# Altium PCB radxa_nx5_io_board_v1.4.PcbDoc (part 3 of 6)
Units mil, origin at the board's own origin, x right, y up, seen from the top; angles counter-clockwise.
Board outline 3937.73 x 3112.19 mil, 6 copper layers (Top, GND02, 内层3, Power4, 内层 5, Bottom), stack 58.1 mil thick; 363 components, 344 nets, 1618 pads, 1594 vias.
Unrouted connection lines stored in the file: 899.
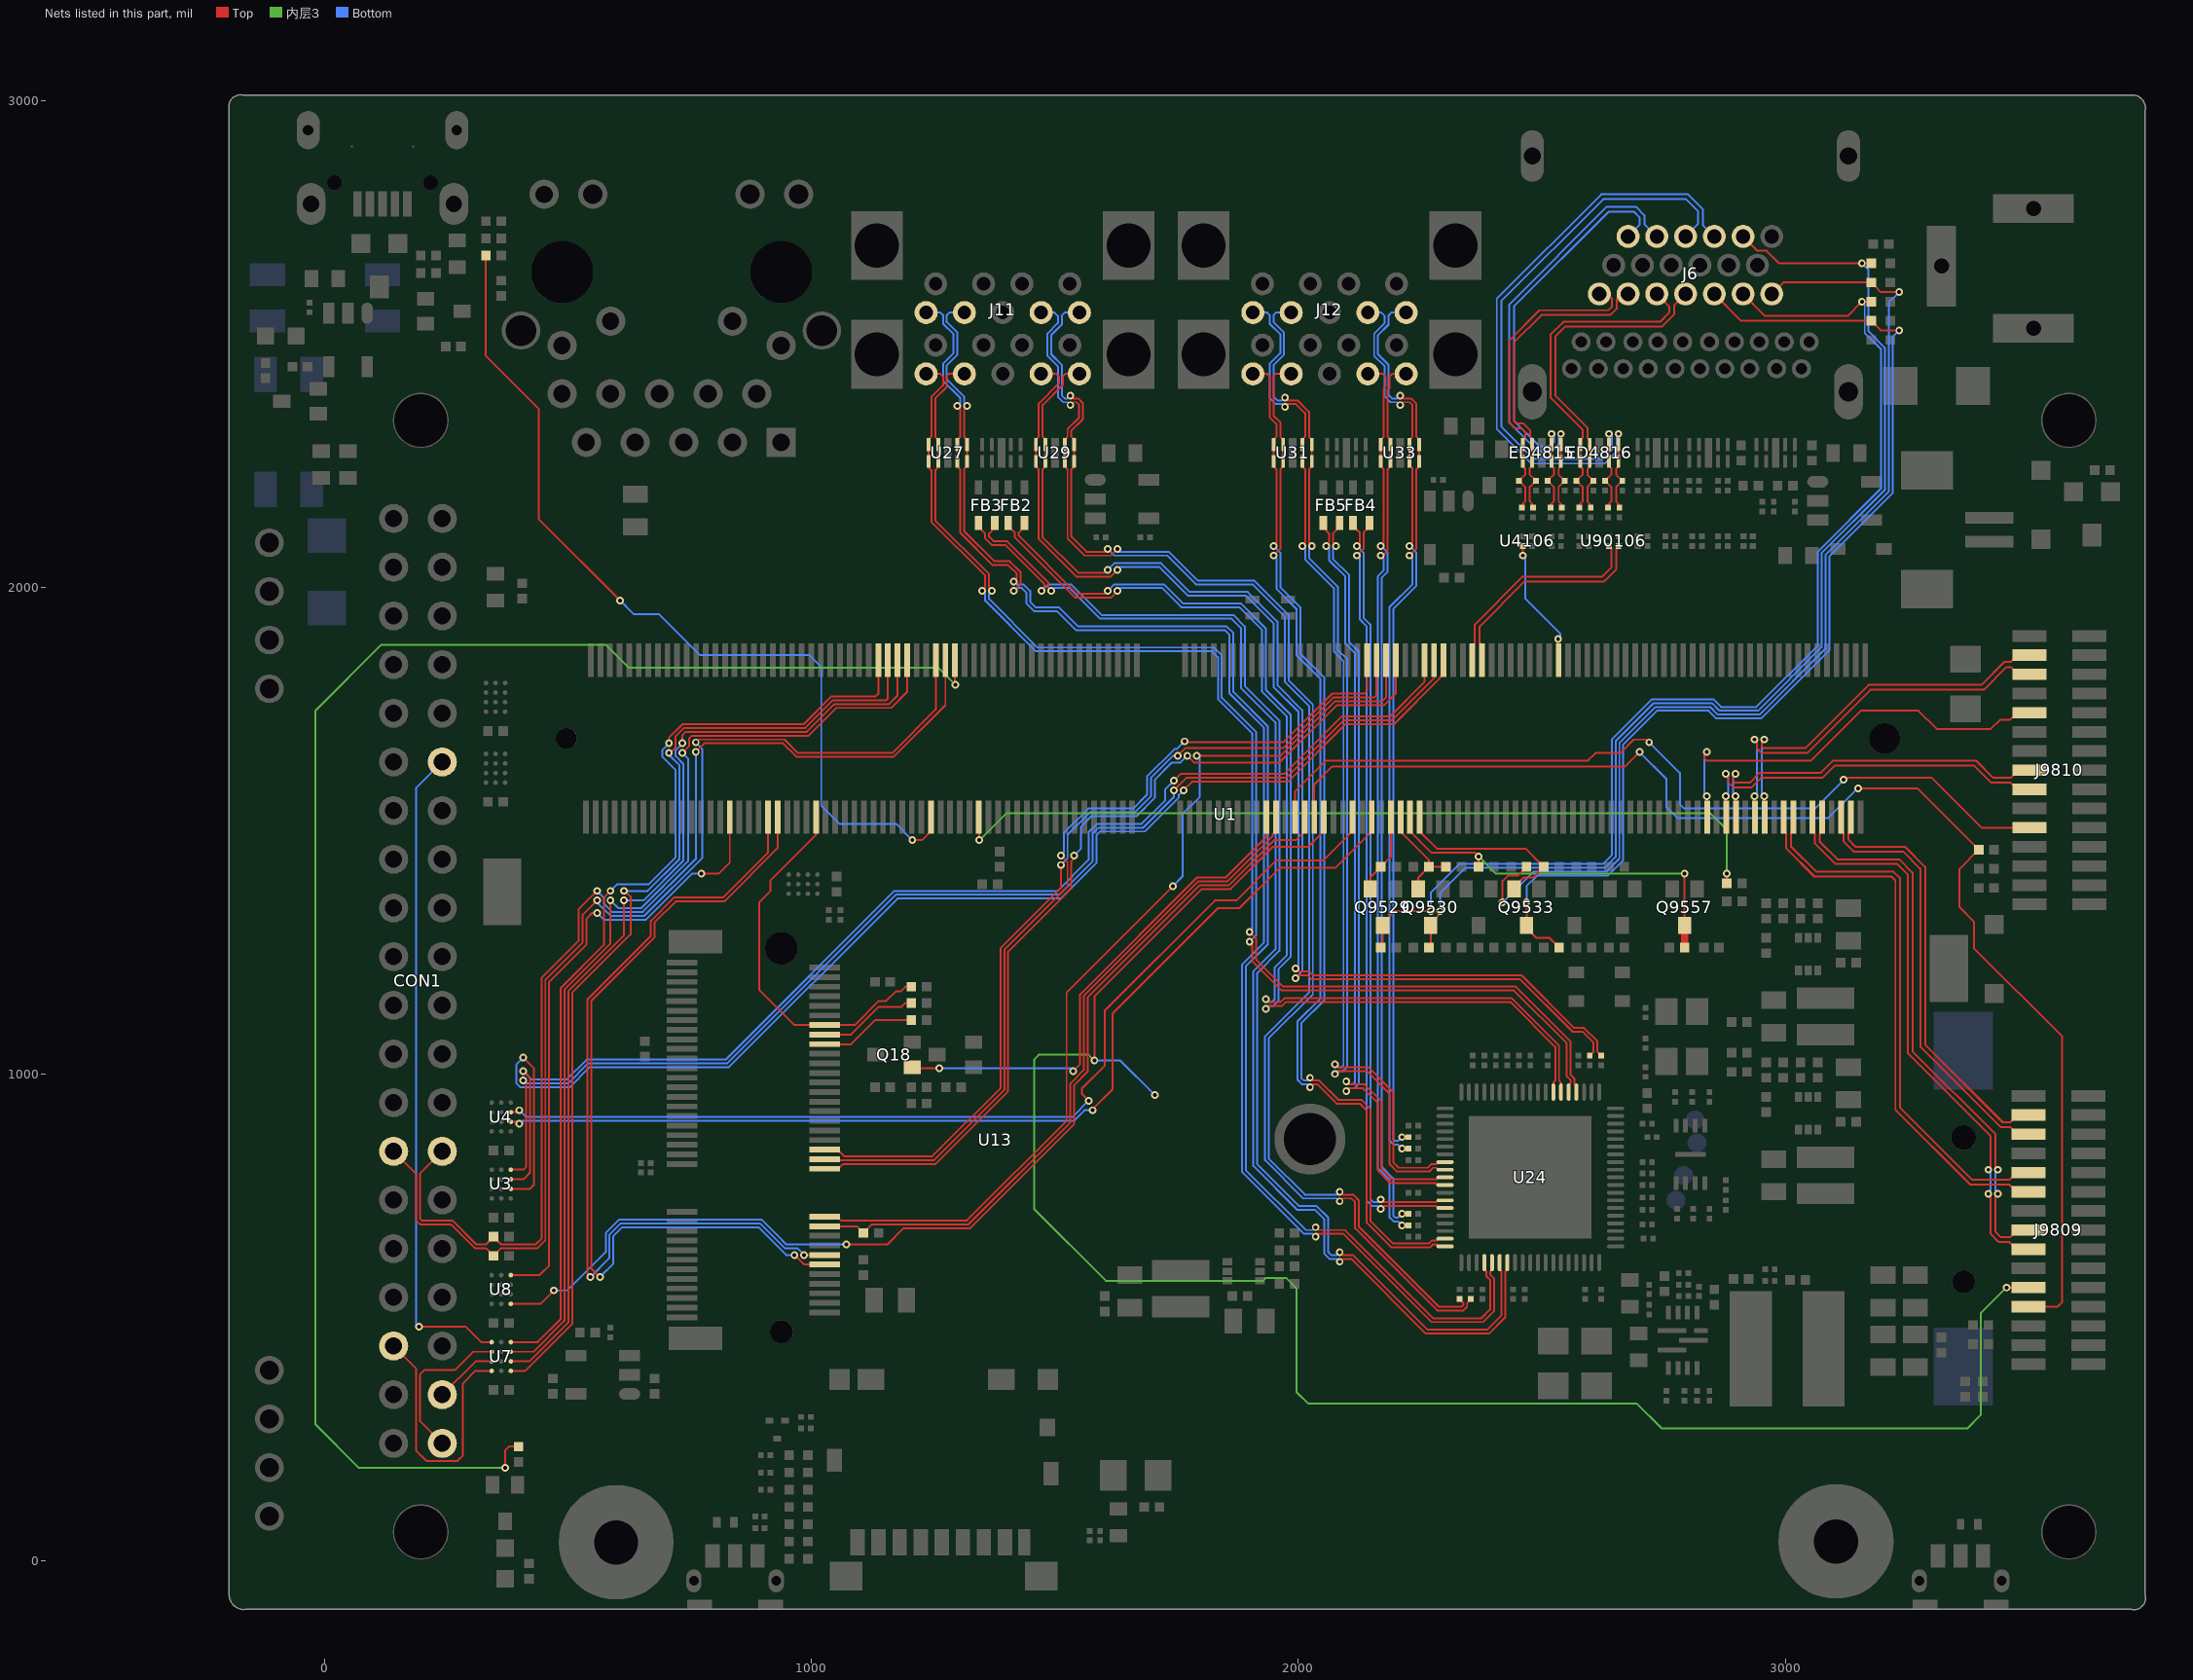
[diagram p6: the nets of this part, all layers, seen from the top]

## Via types
v1: diameter 15.75, hole 7.87, Top to Bottom, 1425 vias
v2: diameter 19.68, hole 11.81, Top to Bottom, 169 vias

## Nets (pads, with @x,y where several pads share a name; then routed paths per layer and width w, separated by ;. In a path a pad name is that pad's centre, name@x,y a point inside that pad or via, vN(x,y) a via of type N, cw(c..) or ccw(c..) an arc to the next point about the centre after c; other vN are vias at no path point) (continued)
HDMI0_TX2P: R95209.2 U1.65 U4106.1 | length 269.5
  Top w3.94: v1(2460.63,2064.96) U4106.1@2460.63,2084.65 ; v1(2533.46,1893.7) 2533.46,1850.39 U1.65@2534.45,1850.39
  Bottom w3.94: v1(2460.63,2064.96) 2460.63,2063.98 2465.55,2059.06 2465.55,1977.22 2538.39,1904.39 2538.39,1898.62 v1(2533.46,1893.7)
HDMI0_TX3N: R95216.2 U1.81 U90106.2 | length 451.1
  Top w3.94: U1.81@2376.97,1850.39 2376.97,1880.91 2372.05,1885.83 2372.05,1919.29 2464.57,2011.81 2628.09,2011.81 2652.56,2036.28 2652.56,2079.72 R95216.2@2657.48,2084.65 U90106.2@2656.69,2084.65
HDMI0_TX3P: R95215.2 U1.83 U90106.1 | length 450.3
  Top w3.94: U1.83@2357.28,1850.39 2357.28,1880.91 2362.2,1885.83 2362.2,1923.37 2460.49,2021.65 2624.02,2021.65 2642.72,2040.35 2642.72,2079.72 U90106.1@2637.8,2084.65
HDMI0_TX_ON_H: U1.118 U8.D3 | length 2263.8
  Top w3.94: U8.D3@381.89,527.56 442.91,527.56 v1(470.47,555.12) ; v1(1070.87,649.61) 1155.51,649.61 1188.98,683.07 1325.42,683.07 1539.37,897.02 1539.37,977.05 1566.93,1004.61 1566.93,1156.8 1797.92,1387.8 1857.53,1387.8 1950.05,1480.32 1994.57,1480.32 2005.5,1491.24 2005.5,1491.72 2012.8,1499.02 U1.118@2012.8,1527.56
  Bottom w3.94: v1(470.47,555.12) 498.03,555.12 576.77,633.86 576.77,673.23 604.33,700.79 896.9,700.79 928.98,669.29 928.98,668.71 948.09,649.61 v1(1070.87,649.61)
HDMI1_TX0N_PORT: C90466.2 ED4816.2 ED4816.9 J6.H9 R95103.1 | length 711.5
  Top w3.94: C90466.2@2600.39,2163.39 2600.39,2169.29 2593.5,2176.18 2593.5,2184.06 2593.5,2206.19 2605.82,2218.5 R95103.1@2606.3,2218.5 2593.5,2231.3 2593.5,2242.13 2598.43,2247.05 ED4816.2@2598.43,2258.37 ED4816.9@2598.43,2292.82 2598.43,2302.17 2593.5,2307.09 2593.5,2327.76 2527.56,2393.7 2527.56,2514.76 2548.23,2535.43 2747.05,2535.43 2771.65,2560.04 2771.65,2578.74 J6.H9@2795.28,2602.36
HDMI1_TX0P_PORT: C90465.2 ED4816.1 ED4816.10 J6.H7 R95104.1 | length 712.3
  Top w3.94: C90465.2@2576.77,2163.39 2576.77,2169.29 2583.66,2176.18 2583.66,2206.19 2571.34,2218.5 R95104.1@2570.87,2218.5 2583.66,2231.3 2583.66,2243.11 2578.74,2248.03 ED4816.1@2578.74,2258.37 ED4816.10@2578.74,2292.82 2578.74,2302.17 2583.66,2307.09 2583.66,2323.68 2517.72,2389.62 2517.72,2403.54 2517.72,2518.84 2544.15,2545.28 2742.97,2545.28 2761.81,2564.12 2761.81,2576.77 J6.H7@2736.22,2602.36
HDMI1_TX1N_PORT: C90464.2 ED4815.5 ED4815.6 J6.H6 R95101.1 | length 987.1
  Top w3.94: v1(2539.37,2314.96) ED4815.6@2539.37,2292.82 ED4815.5@2539.37,2258.37 2539.37,2248.03 2534.45,2243.11 2534.45,2231.3 R95101.1@2547.24,2218.5 2547.01,2218.74 2534.45,2206.19 2534.45,2184.06 2534.45,2176.18 2541.34,2169.29 C90464.2@2541.34,2163.39
  Bottom w3.94: v1(2539.37,2314.96) 2534.45,2310.04 2534.45,2294.01 2519.97,2279.53 2491.14,2279.53 2433.07,2337.6 2433.07,2580.71 2633.86,2781.5 2693.05,2781.5 2710.63,2763.92 2710.63,2746.06 J6.H6@2736.22,2720.47
HDMI1_TX1P_PORT: C90463.2 ED4815.4 ED4815.7 J6.H4 R95102.1 | length 920.9
  Top w3.94: C90463.2@2517.72,2163.39 2517.72,2169.29 2524.61,2176.18 2524.61,2206.19 2512.29,2218.5 R95102.1@2511.81,2218.5 2524.61,2231.3 2524.61,2245.08 2519.69,2250 ED4815.4@2519.69,2258.37 ED4815.7@2519.69,2292.82 v1(2519.69,2314.96)
  Bottom w3.94: v1(2519.69,2314.96) 2524.61,2310.04 2524.61,2298.08 2515.89,2289.37 2495.22,2289.37 2442.91,2341.68 2442.91,2576.63 2637.94,2771.65 2688.98,2771.65 2700.79,2759.84 2700.79,2744.09 J6.H4@2677.17,2720.47
HDMI1_TX2N_PORT: C90462.2 ED4815.2 ED4815.9 J6.H3 R95108.1 | length 665.6
  Top w3.94: C90462.2@2482.28,2163.39 2480.32,2165.35 2480.32,2171.26 2475.39,2176.18 2475.39,2206.19 2487.95,2218.74 R95108.1@2488.19,2218.5 2475.39,2231.3 2475.39,2244.09 2480.32,2249.02 ED4815.2@2480.32,2258.37 ED4815.9@2480.32,2292.82 2480.32,2302.17 2476.38,2306.1 2476.38,2321.99 2461.75,2336.61 2448.96,2336.61 2442.91,2342.66 2442.91,2502.95 2499.02,2559.06 2640.89,2559.06 2653.54,2571.71 2653.54,2591.54 2664.37,2602.36 J6.H3@2677.17,2602.36
HDMI1_TX2P_PORT: C90461.2 ED4815.1 ED4815.10 J6.H1 R95109.1 | length 668.5
  Top w3.94: C90461.2@2458.66,2163.39 2460.63,2165.35 2460.63,2171.26 2465.55,2176.18 2465.55,2206.19 2453.23,2218.5 R95109.1@2452.76,2218.5 2465.55,2231.3 2465.55,2243.11 2460.63,2248.03 ED4815.1@2460.63,2258.37 ED4815.10@2460.63,2292.82 2460.63,2303.15 2465.55,2308.07 2465.55,2318.9 2457.68,2326.77 2444.88,2326.77 2433.07,2338.58 2433.07,2507.03 2494.94,2568.9 2636.81,2568.9 2643.7,2575.79 2643.7,2593.5 2634.84,2602.36 J6.H1@2618.11,2602.36
HDMI1_TX3N_PORT: C90468.2 ED4816.5 ED4816.6 J6.H12 R95106.1 | length 1349.7
  Top w3.94: v1(2657.48,2314.96) ED4816.6@2657.48,2292.82 ED4816.5@2657.48,2258.37 2657.48,2248.03 2652.56,2243.11 2652.56,2231.3 R95106.1@2665.35,2218.5 2665.12,2218.74 2652.56,2206.19 2652.56,2184.06 2652.56,2176.18 2659.45,2169.29 C90468.2@2659.45,2163.39
  Bottom w3.94: v1(2657.48,2314.96) 2653.54,2311.02 2653.54,2278.4 2629.08,2253.94 2478.35,2253.94 2407.48,2324.8 2407.48,2592.52 2622.05,2807.09 2800.34,2807.09 2830.71,2776.71 2830.71,2744.09 J6.H12@2854.33,2720.47
HDMI1_TX3P_PORT: C90467.2 ED4816.4 ED4816.7 J6.H10 R95107.1 | length 1285.9
  Top w3.94: C90467.2@2635.83,2163.39 2635.83,2169.29 2642.72,2176.18 2642.72,2206.19 2630.4,2218.5 R95107.1@2629.92,2218.5 2642.72,2231.3 2642.72,2244.09 2637.8,2249.02 ED4816.4@2637.8,2258.37 ED4816.7@2637.8,2292.82 v1(2637.8,2314.96)
  Bottom w3.94: v1(2637.8,2314.96) 2643.7,2309.06 2643.7,2282.48 2625,2263.78 2482.42,2263.78 2417.32,2328.88 2417.32,2588.44 2626.12,2797.24 2796.26,2797.24 2820.87,2772.64 2820.87,2746.06 J6.H10@2795.28,2720.47
HDMI1_TX_CEC_PORT: ED4820.1 J6.H13 Q9533.3 R95112.2 | length 2273.2
  Top w3.94: v1(2468.5,1352.36) Q9533.3@2468.5,1305.12 2468.5,1299.21 2488.19,1279.53 2515.75,1279.53 R95112.2@2535.43,1259.84 ; J6.H13@2854.33,2602.36 2909.45,2547.24 ED4820.1@3177.21,2547.24 3185.09,2539.37 3185.09,2538.68 3196.2,2527.56 v1(3234.25,2527.56)
  Bottom w3.94: v1(2468.5,1352.36) 2468.5,1385.83 2490.16,1407.48 2635.83,1407.48 2659.45,1431.1 2659.45,1431.36 2667.32,1439.23 2667.32,1676.94 2736.44,1746.06 2842.66,1746.06 2858.41,1730.32 2950.65,1730.32 3090.55,1870.22 3090.55,2062.99 3220.47,2192.91 3220.47,2513.78 v1(3234.25,2527.56)
HDMI1_TX_SBDN: ED4817.1 J6.H19 R95105.2 | length 2212.3
  Top w3.94: v1(2419.29,1352.36) 2419.29,1396.15 2430.62,1407.48 2450.79,1407.48 R95105.2@2468.5,1425.2 ; J6.H19@2972.44,2602.36 2996.06,2625.98 ED4817.1@3177.21,2625.98 3185.09,2618.11 3185.09,2617.42 3196.2,2606.3 v1(3234.25,2606.3)
  Bottom w3.94: v1(2419.29,1352.36) 2482.28,1415.35 2632.31,1415.35 2659.45,1442.49 2659.45,1680.21 2733.18,1753.94 2845.92,1753.94 2861.67,1738.19 2947.39,1738.19 3082.68,1873.48 3082.68,2066.25 3212.6,2196.17 3212.6,2584.65 v1(3234.25,2606.3)
HDMI1_TX_SCL_PORT: ED4819.1 J6.H15 Q9529.3 R95095.2 | length 2426.8
  Top w3.94: R95095.2@2169.29,1259.84 2173.23,1263.78 Q9529.3@2173.23,1305.12 2173.23,1309.06 2198.82,1334.65 v1(2271.65,1334.65) ; J6.H15@2913.39,2602.36 2958.66,2557.09 3127.95,2557.09 v1(3157.48,2586.61) ED4819.1@3177.21,2586.61
  Bottom w3.94: v1(2271.65,1334.65) 2271.65,1372.05 2330.71,1431.1 2625.79,1431.1 2643.7,1449.02 2643.7,1686.73 2726.66,1769.69 2852.44,1769.69 2868.19,1753.94 2940.86,1753.94 3066.93,1880 3066.93,2072.78 3196.85,2202.7 3196.85,2488.86 3163.39,2522.33 3163.39,2580.71 v1(3157.48,2586.61)
HDMI1_TX_SDA_PORT: ED4818.1 J6.H16 Q9530.3 R95098.2 | length 2416
  Top w3.94: R95098.2@2267.72,1259.84 2271.65,1263.78 Q9530.3@2271.65,1305.12 2271.65,1306.69 2293.31,1332.68 v1(2291.34,1334.65) ; J6.H16@2913.39,2720.47 2942.91,2690.94 2961.61,2690.94 2987.2,2665.35 v1(3157.48,2665.35) ED4818.1@3177.21,2665.35
  Bottom w3.94: v1(2291.34,1334.65) 2291.34,1372.05 2342.52,1423.23 2629.05,1423.23 2651.57,1445.76 2651.57,1683.47 2729.92,1761.81 2849.18,1761.81 2864.93,1746.06 2944.12,1746.06 3074.8,1876.74 3074.8,2069.52 3204.72,2199.44 3204.72,2492.13 3171.26,2525.59 3171.26,2651.57 v1(3157.48,2665.35)
HDMI-SCL: Q9529.2 R95094.2 U1.100 | length 165.2
  Top w3.94: Q9529.2@2147.64,1379.92 2147.64,1403.54 R95094.2@2169.29,1425.2 2189.96,1445.87 U1.100@2189.96,1527.56
HDMI-SDA: C90472.2 Q9530.2 R95096.2 U1.98 | length 216.1
  Top w3.94: U1.98@2209.65,1527.56 2209.65,1498.03 2267.72,1439.96 R95096.2@2267.72,1425.2 ; Q9530.2@2246.06,1379.92 2246.06,1403.54 R95096.2@2267.72,1425.2 ; C90472.2@2303.15,1425.2 R95096.2@2267.72,1425.2
HDMI_TX0_CEC_M0: Q9533.2 R95111.2 U1.94 | length 396.7
  Top w3.94: U1.94@2249.02,1527.56 2249.02,1498.03 2284.45,1462.6 2466.54,1462.6 R95111.2@2503.94,1425.2 2482.28,1403.54 2462.6,1403.54 2442.91,1383.86 Q9533.2@2442.91,1379.92
HDMI_TX0_HPD_M0: Q9557.3 R95114.1 R95205.1 U1.96 | length 802.6
  Top w3.94: U1.96@2229.33,1527.56 2229.33,1498.03 2272.64,1454.72 2362.2,1454.72 v1(2370.08,1446.85) R95114.1@2370.08,1425.2 ; Q9557.3@2793.31,1305.12 v1(2793.31,1411.42)
  Top w15.75: R95205.1@2793.31,1259.84 Q9557.3@2793.31,1305.12
  内层3 w3.94: v1(2370.08,1446.85) 2405.51,1411.42 v1(2793.31,1411.42)
HP_DET_L: U1.230 U8.A3 | length 1278.2
  Top w3.94: U8.A3@381.89,586.61 440.94,586.61 460.63,606.3 460.63,1188.98 537.4,1265.75 537.4,1318.9 549.21,1330.71 v1(559.06,1330.71) ; v1(773.62,1411.42) 809.06,1411.42 831.69,1434.06 U1.230@831.69,1527.56
  Bottom w3.94: v1(559.06,1330.71) 572.83,1316.93 659.45,1316.93 753.94,1411.42 v1(773.62,1411.42)
HUB1_DM: FB2.2 U24.64 | length 2196.5
  Top w3.94: FB2.2@1437.01,2131.89 1437.01,2124.02 1425.2,2112.2 1425.2,2105.62 1544.6,1986.22 1602.36,1986.22 v1(1608.27,1992.13) ; v1(1933.07,1133.86) 1938.98,1139.76 1966.54,1139.76 1974.41,1147.64 2435.04,1147.64 2527.56,1055.12 2527.56,986.22 2523.62,982.28 U24.64@2523.62,962.6
  Bottom w3.94: v1(1608.27,1992.13) 1622.05,2005.91 1723.43,2005.91 1762.8,1966.54 1881.89,1966.54 1933.07,1915.35 1933.07,1788.69 1984.25,1737.51 1984.25,1240.83 1958.66,1215.24 1958.66,1149.61 1948.82,1139.76 1938.98,1139.76 v1(1933.07,1133.86)
HUB1_DP: FB2.4 U24.63 | length 2197.3
  Top w3.94: FB2.4@1403.54,2131.89 1403.54,2125.98 1417.32,2112.2 1417.32,2102.36 1541.34,1978.35 1614.17,1978.35 v1(1627.95,1992.13) ; v1(1933.07,1153.54) 1938.98,1147.64 1963.27,1147.64 1971.15,1155.51 2438.3,1155.51 2535.43,1058.38 2535.43,986.22 2539.37,982.28 U24.63@2539.37,962.6
  Bottom w3.94: v1(1627.95,1992.13) 1633.86,1998.03 1720.16,1998.03 1759.53,1958.66 1878.63,1958.66 1925.2,1912.09 1925.2,1785.43 1976.38,1734.25 1976.38,1244.09 1950.79,1218.5 1950.79,1152.87 1945.56,1147.64 1938.98,1147.64 v1(1933.07,1153.54)
HUB1_SSRX_N: J11.5 U24.61 U27.5 U27.6 | length 2572.4
  Top w3.94: J11.5@1235.04,2438.19 1264.57,2438.19 1269.69,2433.07 1269.69,2414.68 1246.06,2391.06 1246.06,2309.06 1240.16,2303.15 U27.5@1240.16,2292.82 U27.6@1240.16,2258.37 1240.16,2246.06 1246.06,2240.16 1246.06,2133.86 1356.3,2023.62 1356.3,1998.03 v1(1350.39,1992.13) ; v1(1899.61,1291.34) 1913.39,1277.56 1913.39,1234.25 1968.5,1179.13 2446.17,1179.13 2559.06,1066.25 2559.06,998.03 2566.93,990.16 2566.93,980.32 2570.87,976.38 U24.61@2570.87,962.6
  Bottom w3.94: v1(1350.39,1992.13) 1356.3,1986.22 1356.3,1972.44 1460.63,1868.11 1822.83,1868.11 1834.65,1856.3 1834.65,1769.69 1905.51,1698.82 1905.51,1297.24 v1(1899.61,1291.34)
HUB1_SSRX_P: J11.6 U24.62 U27.4 U27.7 | length 2574.7
  Top w3.94: J11.6@1313.78,2438.19 1281.5,2438.19 1277.56,2434.25 1277.56,2411.42 1253.94,2387.8 1253.94,2309.06 1259.84,2303.15 U27.4@1259.84,2292.82 U27.7@1259.84,2258.37 1259.84,2246.06 1253.94,2240.16 1253.94,2137.12 1364.17,2026.88 1364.17,1998.03 v1(1370.08,1992.13) ; v1(1899.61,1271.65) 1905.51,1265.75 1905.51,1230.99 1965.24,1171.26 2442.91,1171.26 2551.18,1062.99 2551.18,994.77 2559.06,986.9 2559.06,980.32 2555.12,976.38 U24.62@2555.12,962.6
  Bottom w3.94: v1(1370.08,1992.13) 1364.17,1986.22 1364.17,1975.7 1463.89,1875.98 1826.1,1875.98 1842.52,1859.56 1842.52,1772.95 1913.39,1702.08 1913.39,1285.43 v1(1899.61,1271.65)
HUB1_SSTX_N: C73.2 J11.8 U29.1 U29.10 | length 2412.9
  Top w3.94: J11.8@1471.26,2438.19 1502.76,2438.19 1507.87,2433.07 1507.87,2418.62 1466.54,2377.28 1466.54,2309.06 1460.63,2303.15 U29.10@1460.63,2292.82 U29.1@1460.63,2258.37 1460.63,2248.03 1466.54,2242.13 1466.54,2099.1 1543.98,2021.65 1614.17,2021.65 v1(1627.95,2035.43) ; v1(1994.09,1216.54) 2000,1210.63 2021.65,1210.63 2029.53,1202.76 2457.99,1202.76 2566.25,1094.49 2586.61,1094.49 2614.17,1066.93 2614.17,1045.28 C73.2@2622.05,1037.4
  Bottom w3.94: v1(1627.95,2035.43) 1633.86,2041.34 1714.57,2041.34 1773.62,1982.28 1892.41,1982.28 1948.82,1925.87 1948.82,1795.28 2000,1744.09 2000,1222.44 v1(1994.09,1216.54)
HUB1_SSTX_P: C72.2 J11.9 U29.2 U29.9 | length 2420.4
  Top w3.94: J11.9@1550,2438.19 1520.87,2438.19 1515.75,2433.07 1515.75,2415.35 1474.41,2374.02 1474.41,2309.06 1480.32,2303.15 U29.9@1480.32,2292.82 U29.2@1480.32,2258.37 1480.32,2248.03 1474.41,2242.13 1474.41,2102.36 1547.24,2029.53 1602.36,2029.53 v1(1608.27,2035.43) ; v1(1994.09,1196.85) 2000,1202.76 2018.39,1202.76 2026.27,1194.88 2454.72,1194.88 2562.99,1086.61 2583.35,1086.61 2606.3,1063.67 2606.3,1045.28 C72.2@2598.43,1037.4
  Bottom w3.94: v1(1608.27,2035.43) 1622.05,2049.21 1717.83,2049.21 1776.88,1990.16 1895.67,1990.16 1956.69,1929.13 1956.69,1798.54 2007.87,1747.36 2007.87,1210.63 v1(1994.09,1196.85)
HUB2_DM: FB3.2 U24.26 | length 2627.2
  Top w3.94: FB3.2@1375.98,2131.89 1375.98,2122.05 1364.17,2110.24 1364.17,2103.66 1373.34,2094.49 1400.9,2094.49 1486.22,2009.17 1486.22,1998.03 v1(1492.13,1992.13) ; v1(2084.65,614.17) 2090.55,620.08 2108.27,620.08 2261.81,466.54 2391.06,466.54 2425.2,500.68 2425.2,594.49 2429.13,598.43 U24.26@2429.13,612.2
  Bottom w3.94: v1(1492.13,1992.13) 1498.03,1998.03 1529.53,1998.03 1592.52,1935.04 1862.88,1935.04 1881.89,1916.03 1881.89,1793.31 1952.76,1722.44 1952.76,1255.91 1907.48,1210.63 1907.48,811.02 1998.03,720.47 2034.14,720.47 2053.15,701.46 2053.15,630.6 2063.67,620.08 2078.74,620.08 v1(2084.65,614.17)
HUB2_DP: FB3.4 U24.25 | length 2637.9
  Top w3.94: FB3.4@1342.52,2131.89 1342.52,2124.02 1356.3,2110.24 1356.3,2100.39 1370.08,2086.61 1397.64,2086.61 1478.35,2005.91 1478.35,1998.03 v1(1472.44,1992.13) ; v1(2084.65,633.86) 2090.55,627.95 2111.53,627.95 2265.07,474.41 2387.8,474.41 2417.32,503.94 2417.32,594.49 2413.39,598.43 U24.25@2413.39,612.2
  Bottom w3.94: v1(1472.44,1992.13) 1486.22,2005.91 1532.79,2005.91 1595.78,1942.91 1866.14,1942.91 1889.76,1919.29 1889.76,1796.57 1960.63,1725.7 1960.63,1252.64 1915.35,1207.37 1915.35,814.29 2001.29,728.35 2037.4,728.35 2061.02,704.72 2061.02,633.86 2066.93,627.95 2078.74,627.95 v1(2084.65,633.86)
HUB2_SSRX_N: J11.16 U24.23 U27.2 U27.9 | length 3096.1
  Top w3.94: v1(1299.21,2372.05) 1305.12,2366.14 1305.12,2309.06 1299.21,2303.15 U27.2@1299.21,2292.82 U27.9@1299.21,2258.37 1299.21,2248.03 1305.12,2242.13 1305.12,2112.2 1372.05,2045.28 1403.54,2045.28 1421.26,2027.56 1421.26,2017.72 v1(1415.35,2011.81) ; v1(2035.43,685.04) 2041.34,679.13 2095.78,679.13 2276.88,498.03 2375.98,498.03 2393.7,515.75 2393.7,576.77 2385.83,584.65 2385.83,594.49 2381.89,598.43 U24.23@2381.89,612.2
  Bottom w3.94: J11.16@1235.04,2564.17 1264.57,2564.17 1269.69,2559.06 1269.69,2541.34 1291.34,2519.69 1291.34,2480.82 1269.69,2459.17 1269.69,2423.9 1305.12,2388.47 1305.12,2377.95 v1(1299.21,2372.05) ; v1(1415.35,2011.81) 1421.26,2005.91 1435.04,2005.91 1448.82,1992.13 1448.82,1969.8 1459.95,1958.66 1507.87,1958.66 1547.24,1919.29 1852.36,1919.29 1866.14,1905.51 1866.14,1784.76 1937.01,1713.89 1937.01,1266.42 1891.73,1221.15 1891.73,802.47 2015.07,679.13 2029.53,679.13 v1(2035.43,685.04)
HUB2_SSRX_P: J11.17 U24.24 U27.1 U27.10 | length 3137.4
  Top w3.94: v1(1318.9,2372.05) 1312.99,2366.14 1312.99,2309.06 1318.9,2303.15 U27.1@1318.9,2292.82 U27.10@1318.9,2258.37 1318.9,2248.03 1312.99,2242.13 1312.99,2115.47 1375.31,2053.15 1406.8,2053.15 1429.13,2030.82 1429.13,2005.91 v1(1415.35,1992.13) ; v1(2035.43,665.35) 2035.43,669.29 2037.4,671.26 2092.52,671.26 2273.62,490.16 2379.25,490.16 2401.57,512.49 2401.57,576.1 2401.57,580.03 2393.7,587.91 2393.7,594.49 2397.64,598.43 U24.24@2397.64,612.2
  Bottom w3.94: J11.17@1313.78,2564.17 1282.68,2564.17 1277.56,2559.06 1277.56,2544.6 1299.21,2522.95 1299.21,2477.56 1277.56,2455.91 1277.56,2427.17 1312.99,2391.73 1312.99,2377.95 v1(1318.9,2372.05) v1@1319.88,2371.06 ; v1(1415.35,1992.13) 1421.26,1998.03 1431.78,1998.03 1440.94,1988.86 1440.94,1966.54 1456.69,1950.79 1503.94,1950.79 1543.31,1911.42 1849.1,1911.42 1858.27,1902.25 1858.27,1781.5 1929.13,1710.63 1929.13,1269.69 1883.86,1224.41 1883.86,799.21 2011.81,671.26 2029.53,671.26 v1(2035.43,665.35)
HUB2_SSTX_N: C75.2 J11.19 U29.4 U29.7 | length 2852
  Top w3.94: v1(1531.5,2374.02) 1537.4,2379.92 1543.98,2379.92 1549.21,2374.69 1549.21,2348.43 1525.59,2324.8 1525.59,2309.06 1519.69,2303.15 U29.7@1519.69,2292.82 U29.4@1519.69,2258.37 1519.69,2248.03 1525.59,2242.13 1525.59,2100.39 1561.02,2064.96 1614.17,2064.96 v1(1627.95,2078.74) ; v1(2084.65,757.87) 2090.55,751.97 2112.2,751.97 2124.02,740.16 2124.02,686.33 2288.69,521.65 2335.32,521.65 2338.58,524.92 2338.58,529.53 C75.2@2330.71,537.4
  Bottom w3.94: J11.19@1471.26,2564.17 1498.82,2564.17 1505.91,2557.09 1505.91,2542.63 1484.25,2520.98 1484.25,2475.09 1505.91,2453.43 1505.91,2390.44 1516.42,2379.92 1525.59,2379.92 v1(1531.5,2374.02) ; v1(1627.95,2078.74) 1630.91,2072.83 1733.58,2072.83 1792.63,2013.78 1908.77,2013.78 1980.32,1942.24 1980.32,1808.38 2029.53,1759.17 2029.53,1163.39 1938.98,1072.83 1938.98,826.1 2013.1,751.97 2078.74,751.97 v1(2084.65,757.87)
HUB2_SSTX_P: C74.2 J11.20 U29.5 U29.6 | length 2853
  Top w3.94: v1(1531.5,2393.7) 1537.4,2387.8 1547.24,2387.8 1557.09,2377.95 1557.09,2352.36 1557.09,2345.16 1533.46,2321.54 1533.46,2309.06 1539.37,2303.15 U29.6@1539.37,2292.82 U29.5@1539.37,2258.37 1539.37,2248.03 1533.46,2242.13 1533.46,2103.66 1564.29,2072.83 1602.36,2072.83 v1(1608.27,2078.74) ; v1(2084.65,738.19) 2090.55,744.09 2108.94,744.09 2116.14,736.9 2116.14,683.07 2285.43,513.78 2338.58,513.78 2346.46,521.65 2346.46,529.53 C74.2@2354.33,537.4
  Bottom w3.94: v1(1531.5,2393.7) 1525.59,2387.8 1519.69,2387.8 1513.78,2393.7 1513.78,2456.69 1492.13,2478.35 1492.13,2517.72 1513.78,2539.37 1513.78,2558.27 1519.69,2564.17 J11.20@1550,2564.17 ; v1(1608.27,2078.74) 1622.05,2064.96 1730.32,2064.96 1789.37,2005.91 1905.51,2005.91 1972.44,1938.98 1972.44,1805.12 2021.65,1755.91 2021.65,1167.32 1931.1,1076.77 1931.1,822.83 2009.84,744.09 2078.74,744.09 v1(2084.65,738.19)
HUB3_DM: FB4.2 U24.14 | length 1583.3
  Top w3.94: v1(2120.08,2064.96) 2133.86,2078.74 2133.86,2112.2 2145.67,2124.02 FB4.2@2145.67,2131.89 ; v1(2169.29,722.44) 2175.2,728.35 2283.46,728.35 2287.4,724.41 U24.14@2301.18,724.41
  Bottom w3.94: v1(2120.08,2064.96) 2125.98,2059.06 2125.98,1933.75 2139.76,1919.97 2139.76,740.16 2151.57,728.35 2163.39,728.35 v1(2169.29,722.44)
HUB3_DP: FB4.4 U24.13 | length 1571.1
  Top w3.94: FB4.4@2112.2,2131.89 2112.2,2125.98 2125.98,2112.2 2125.98,2090.55 v1(2120.08,2084.65) ; v1(2169.29,742.13) 2175.2,736.22 2283.46,736.22 2287.4,740.16 U24.13@2301.18,740.16
  Bottom w3.94: v1(2120.08,2084.65) 2133.86,2070.87 2133.86,1937.01 2147.64,1923.23 2147.64,743.42 2154.84,736.22 2163.39,736.22 v1(2169.29,742.13)
HUB3_SSRX_N: J12.5 U24.18 U31.5 U31.6 | length 2134.2
  Top w3.94: J12.5@1906.3,2438.19 1935.83,2438.19 1940.94,2433.07 1940.94,2349.1 1954.72,2335.32 1954.72,2309.06 1948.82,2303.15 U31.5@1948.82,2292.82 U31.6@1948.82,2258.37 1948.82,2248.03 1954.72,2242.13 1954.72,2090.55 v1(1948.82,2084.65) ; v1(2023.62,992.13) 2029.53,986.22 2042.63,986.22 2082,946.85 2129.25,946.85 2147.64,928.46 2147.64,698.14 2194.21,651.57 2267.72,651.57 2273.62,657.48 2283.46,657.48 2287.4,661.42 U24.18@2301.18,661.42
  Bottom w3.94: v1(1948.82,2084.65) 1962.6,2070.87 1962.6,2000 2003.94,1958.66 2003.94,1863.5 2053.15,1814.29 2053.15,1151.57 2005.91,1104.33 2005.91,991.45 2011.14,986.22 2017.72,986.22 v1(2023.62,992.13)
HUB3_SSRX_P: J12.6 U24.19 U31.4 U31.7 | length 2149.5
  Top w3.94: v1(1948.82,2064.96) 1962.6,2078.74 1962.6,2242.13 1968.5,2248.03 U31.7@1968.5,2258.37 U31.4@1968.5,2292.82 1968.5,2303.15 1962.6,2309.06 1962.6,2338.58 1948.82,2352.36 1948.82,2434.25 1952.76,2438.19 J12.6@1985.04,2438.19 ; v1(2023.62,972.44) 2029.53,978.35 2039.37,978.35 2078.74,938.98 2125.98,938.98 2139.76,925.2 2139.76,694.88 2190.94,643.7 2270.98,643.7 2276.88,649.61 2283.46,649.61 2287.4,645.67 U24.19@2301.18,645.67
  Bottom w3.94: v1(1948.82,2064.96) 1954.72,2059.06 1954.72,1996.74 1996.06,1955.4 1996.06,1860.24 2045.28,1811.02 2045.28,1155.51 1998.03,1108.27 1998.03,988.19 2007.87,978.35 2017.72,978.35 v1(2023.62,972.44)
HUB3_SSTX_N: C78.2 J12.8 U33.1 U33.10 | length 1828.9
  Top w3.94: J12.8@2142.52,2438.19 2174.02,2438.19 2179.13,2433.07 2179.13,2412.71 2175.2,2408.77 2175.2,2309.06 2169.29,2303.15 U33.10@2169.29,2292.82 U33.1@2169.29,2258.37 2169.29,2248.03 2175.2,2242.13 2175.2,2090.55 v1(2169.29,2084.65) ; v1(2212.6,712.6) C78.2@2226.38,712.6
  Bottom w3.94: v1(2169.29,2084.65) 2183.07,2070.87 2183.07,2031.5 2171.26,2019.69 2171.26,809.06 2194.88,785.43 2194.88,708.66 2198.82,704.72 2204.72,704.72 v1(2212.6,712.6)
HUB3_SSTX_P: C77.2 J12.9 U33.2 U33.9 | length 1843.5
  Top w3.94: v1(2169.29,2064.96) 2171.26,2062.99 2183.07,2074.8 2183.07,2242.13 2188.98,2248.03 U33.2@2188.98,2258.37 U33.9@2188.98,2292.82 2188.98,2303.15 2183.07,2309.06 2183.07,2405.51 2187.01,2409.45 2187.01,2433.07 2192.13,2438.19 J12.9@2221.26,2438.19 ; v1(2212.6,688.98) C77.2@2226.38,688.98
  Bottom w3.94: v1(2169.29,2064.96) 2175.2,2059.06 2175.2,2034.76 2163.39,2022.95 2163.39,805.79 2187.01,782.17 2187.01,705.4 2195.56,696.85 2204.72,696.85 v1(2212.6,688.98)
HUB4_DM: FB5.2 U24.11 | length 1585
  Top w3.94: v1(2076.77,2084.65) 2070.87,2090.55 2070.87,2110.24 2084.65,2124.02 FB5.2@2084.65,2131.89 ; v1(2098.43,964.57) 2104.33,970.47 2132.57,970.47 2163.39,939.65 2163.39,801.18 2188.98,775.59 2281.5,775.59 2285.43,771.65 U24.11@2301.18,771.65
  Bottom w3.94: v1(2076.77,2084.65) 2070.87,2078.74 2070.87,2058.38 2104.33,2024.92 2104.33,1887.12 2124.02,1867.43 2124.02,980.32 2114.17,970.47 2104.33,970.47 v1(2098.43,964.57)
HUB4_DP: FB5.4 U24.10 | length 1571.1
  Top w3.94: FB5.4@2051.18,2131.89 2051.18,2122.05 2062.99,2110.24 2062.99,2090.55 v1(2057.09,2084.65) ; v1(2098.43,984.25) 2104.33,978.35 2135.83,978.35 2171.26,942.91 2171.26,804.44 2192.24,783.46 2283.46,783.46 2287.4,787.4 U24.10@2301.18,787.4
  Bottom w3.94: v1(2057.09,2084.65) 2062.99,2078.74 2062.99,2055.12 2096.46,2021.65 2096.46,1883.86 2116.14,1864.17 2116.14,983.58 2110.91,978.35 2104.33,978.35 v1(2098.43,984.25)
HUB4_SSRX_N: J12.16 U24.8 U31.2 U31.9 | length 2123.4
  Top w3.94: v1(1972.44,2370.08) 1978.35,2375.98 1994.77,2375.98 2013.78,2356.97 2013.78,2309.06 2007.87,2303.15 U31.2@2007.87,2292.82 U31.9@2007.87,2258.37 2007.87,2248.03 2013.78,2242.13 2013.78,2090.55 v1(2007.87,2084.65) ; v1(2074.8,1019.69) 2080.71,1013.78 2143.7,1013.78 2194.88,962.6 2194.88,818.22 2206.02,807.09 2265.75,807.09 2273.62,814.96 2283.46,814.96 2287.4,818.9 U24.8@2301.18,818.9
  Bottom w3.94: J12.16@1906.3,2564.17 1935.83,2564.17 1940.94,2559.06 1940.94,2541.34 1962.6,2519.69 1962.6,2480.82 1940.94,2459.17 1940.94,2388.47 1953.43,2375.98 1966.54,2375.98 v1(1972.44,2370.08) ; v1(2007.87,2084.65) 2013.78,2078.74 2013.78,2057.09 2072.83,1998.03 2072.83,1868.11 2092.52,1848.43 2092.52,1017.72 2088.58,1013.78 2080.71,1013.78 v1(2074.8,1019.69)
HUB4_SSRX_P: J12.17 U24.9 U31.1 U31.10 | length 2138
  Top w3.94: v1(1972.44,2389.76) 1978.35,2383.86 1998.03,2383.86 2021.65,2360.24 2021.65,2309.06 2027.56,2303.15 U31.1@2027.56,2292.82 U31.10@2027.56,2258.37 2027.56,2248.03 2021.65,2242.13 2021.65,2090.55 v1(2027.56,2084.65) ; v1(2074.8,1000) 2080.71,1005.91 2140.44,1005.91 2187.01,959.34 2187.01,814.96 2202.76,799.21 2269.01,799.21 2276.88,807.09 2283.46,807.09 2287.4,803.15 U24.9@2301.18,803.15
  Bottom w3.94: v1(1972.44,2389.76) 1966.54,2383.86 1956.69,2383.86 1948.82,2391.73 1948.82,2455.91 1970.47,2477.56 1970.47,2522.95 1948.82,2544.6 1948.82,2559.06 1953.94,2564.17 J12.17@1985.04,2564.17 ; v1(2027.56,2084.65) 2021.65,2078.74 2021.65,2060.35 2080.71,2001.29 2080.71,1871.37 2100.39,1851.69 2100.39,1014.45 2091.84,1005.91 2080.71,1005.91 v1(2074.8,1000)
HUB4_SSTX_N: C80.2 J12.19 U33.4 U33.7 | length 1867.1
  Top w3.94: v1(2208.66,2374.02) 2214.57,2379.92 2228.35,2379.92 2234.25,2374.02 2234.25,2309.06 2228.35,2303.15 U33.7@2228.35,2292.82 U33.4@2228.35,2258.37 2228.35,2250 2234.25,2244.09 2234.25,2090.55 v1(2228.35,2084.65) ; v1(2212.6,870.08) C80.2@2226.38,870.08
  Bottom w3.94: J12.19@2142.52,2564.17 2170.08,2564.17 2177.17,2557.09 2177.17,2542.63 2155.51,2520.98 2155.51,2475.09 2177.17,2453.43 2177.17,2391.73 2188.98,2379.92 2202.76,2379.92 v1(2208.66,2374.02) ; v1(2212.6,870.08) 2204.72,862.2 2198.82,862.2 2194.88,866.14 2194.88,1955.4 2242.13,2002.64 2242.13,2070.87 v1(2228.35,2084.65)
HUB4_SSTX_P: C79.2 J12.20 U33.5 U33.6 | length 1882.4
  Top w3.94: v1(2208.66,2393.7) 2214.57,2387.8 2231.61,2387.8 2242.13,2377.28 2242.13,2309.06 2248.03,2303.15 U33.6@2248.03,2292.82 U33.5@2248.03,2258.37 2248.03,2248.03 2242.13,2242.13 2242.13,2078.74 v1(2228.35,2064.96) ; v1(2212.6,846.46) C79.2@2226.38,846.46
  Bottom w3.94: v1(2208.66,2393.7) 2202.76,2387.8 2192.24,2387.8 2185.04,2394.99 2185.04,2456.69 2163.39,2478.35 2163.39,2517.72 2185.04,2539.37 2185.04,2558.27 2190.94,2564.17 J12.20@2221.26,2564.17 ; v1(2212.6,846.46) 2204.72,854.33 2195.56,854.33 2187.01,862.88 2187.01,1958.66 2234.25,2005.91 2234.25,2059.06 v1(2228.35,2064.96)
I2C0_SCL_M2: CON1.28 R7.1 U1.185 | length 2370.4
  Top w3.94: CON1.28@240.94,840.94 194.88,794.88 194.88,702.76 198.82,698.82 261.81,698.82 311.02,649.61 330.71,649.61 R7.1@346.46,665.35 362.2,649.61 433.07,649.61 444.88,661.42 444.88,1196.85 521.65,1273.62 521.65,1338.58 v1(559.06,1375.98) ; v1(761.81,1661.42) 779.53,1679.13 940.94,1679.13 968.5,1651.57 1168.67,1651.57 1274.61,1757.51 U1.185@1274.61,1850.39
  Bottom w3.94: v1(559.06,1375.98) 572.83,1362.2 572.83,1349.72 589.88,1332.68 652.93,1332.68 761.81,1441.56 v1(761.81,1661.42)
I2C0_SDA_M2: CON1.27 R8.1 U1.187 | length 2381.7
  Top w3.94: CON1.27@140.94,840.94 187.01,794.88 187.01,699.49 195.56,690.94 258.55,690.94 307.76,641.73 330.71,641.73 R8.1@346.46,625.98 362.2,641.73 436.33,641.73 452.76,658.16 452.76,1192.91 529.53,1269.69 529.53,1326.77 v1(559.06,1356.3) ; v1(761.81,1681.1) 767.72,1687.01 944.21,1687.01 971.77,1659.45 1165.41,1659.45 1254.92,1748.96 U1.187@1254.92,1850.39
  Bottom w3.94: v1(559.06,1356.3) 559.06,1352.36 586.61,1324.8 656.19,1324.8 775.59,1444.21 775.59,1667.32 v1(761.81,1681.1)
I2C3_SCL-3V3: R95190.1 U13.60 | length 205.1
  Top w3.94: U13.60@1026.58,1080.71 1080.71,1080.71 1137.8,1137.8 1185.04,1137.8 1192.91,1145.67 R95190.1@1204.72,1145.67
I2C3_SDA-3V3: R95189.1 U13.58 | length 198.5
  Top w3.94: U13.58@1026.58,1061.02 1080.71,1061.02 1129.92,1110.24 R95189.1@1204.72,1110.24
I2C5_SCL_M3_CAM: U1.99 U13.32 | length 1910.9
  Top w3.94: U13.32@1026.58,805.12 1055.12,805.12 1064.96,814.96 1254.55,814.96 1403.54,963.95 1403.54,1251.39 1533.46,1381.32 1533.46,1437.01 1539.37,1442.91 v1(1539.37,1448.82) ; v1(1771.65,1653.54) 1785.43,1639.76 1961.05,1639.76 2079.16,1757.87 2176.18,1757.87 2199.8,1781.5 U1.99@2199.8,1850.39
  Bottom w3.94: v1(1539.37,1448.82) 1553.15,1462.6 1553.15,1507.93 1574.75,1529.53 1667.26,1529.53 1704.72,1566.99 1704.72,1604.39 1740.1,1639.76 1757.87,1639.76 v1(1771.65,1653.54)
I2C5_SDA_M3_CAM: U1.101 U13.22 | length 1966.2
  Top w3.94: U13.22@1026.58,706.69 1052.16,706.69 1060.04,698.82 1318.9,698.82 1523.62,903.54 1523.62,1167.32 v1(1742.13,1385.83) ; v1(1791.34,1653.54) 1963.7,1653.54 2075.9,1765.75 2172.24,1765.75 2180.12,1773.62 U1.101@2180.12,1850.39
  Bottom w3.94: v1(1742.13,1385.83) 1761.81,1405.51 1761.81,1533.66 1797.24,1569.1 1797.24,1647.64 v1(1791.34,1653.54)
I2C6_SCL_M3: J9809.4 R126.1 U1.116 | length 2733.2
  Top w3.94: U1.116@2032.48,1527.56 2032.48,1594.49 2069.88,1631.89 2671.26,1631.89 v1(2700.79,1661.42) ; v1(3149.61,1586.61) 3271.65,1586.61 R126.1@3397.64,1460.63 3358.27,1421.26 3358.27,1342.52 3387.8,1312.99 3387.8,1257.87 3568.9,1076.77 3568.9,531.5 3559.06,521.65 J9809.4@3500,521.65
  Bottom w3.94: v1(2700.79,1661.42) 2755.91,1606.3 2755.91,1548.32 2778.63,1525.59 3088.58,1525.59 v1(3149.61,1586.61)
I2C6_SDA_M3: R95208.1 U1.178 | length 1730
  Top w3.94: U1.178@1343.5,1527.56 1344.49,1526.57 v1(1344.49,1480.32) ; R95208.1@2879.92,1391.73 v1(2879.92,1411.42)
  内层3 w3.94: v1(1344.49,1480.32) 1399.61,1535.43 2846.46,1535.43 2879.92,1501.97 v1(2879.92,1411.42)
I2C7_SCL_M0_CODEC: U1.108 U4.B3 | length 2109.5
  Top w3.94: U4.B3@381.89,921.26 395.67,921.26 v1(399.61,925.2) ; v1(1568.9,944.88) 1555.12,958.66 1555.12,970.27 1602.36,1017.52 1602.36,1130.54 1828.12,1356.3 1872.3,1356.3 1954.98,1438.98 2051.66,1438.98 2103.92,1491.24 2103.92,1491.72 2111.22,1499.02 U1.108@2111.22,1527.56
  Bottom w3.94: v1(399.61,925.2) 413.39,911.42 1535.43,911.42 v1(1568.9,944.88)
I2C7_SDA_M0_CODEC: U1.104 U4.C3 | length 2141.3
  Top w3.94: U4.C3@381.89,901.57 395.67,901.57 v1(399.61,897.64) ; v1(1576.77,925.2) 1575.79,926.18 1618.11,968.5 1618.11,1124.02 1834.65,1340.55 1878.83,1340.55 1961.5,1423.23 2075.28,1423.23 2143.29,1491.24 2143.29,1491.72 2150.59,1499.02 U1.104@2150.59,1527.56
  Bottom w3.94: v1(399.61,897.64) 405.51,903.54 1538.69,903.54 1560.35,925.2 v1(1576.77,925.2)
I2C8_SCL_M2_CAM: U1.103 U13.36 | length 1851
  Top w3.94: U13.36@1026.58,844.49 1053.15,844.49 1066.93,830.71 1248.03,830.71 1387.8,970.47 1387.8,1257.92 1511.81,1381.93 v1(1511.81,1429.13) ; v1(1751.97,1653.54) 1767.72,1669.29 1968.31,1669.29 2072.64,1773.62 2156.5,1773.62 2160.43,1777.56 U1.103@2160.43,1850.39
  Bottom w3.94: v1(1511.81,1429.13) 1525.59,1442.91 1525.59,1491.51 1571.48,1537.4 1664,1537.4 1696.85,1570.25 1696.85,1607.65 1742.74,1653.54 v1(1751.97,1653.54)
I2C8_SDA_M2_CAM: U1.105 U13.34 | length 1854.5
  Top w3.94: U13.34@1026.58,824.8 1045.28,824.8 1047.25,822.83 1251.29,822.83 1395.67,967.21 1395.67,1254.66 1525.59,1384.58 1525.59,1435.04 v1(1511.81,1448.82) ; v1(1765.75,1683.07) 1763.78,1681.1 1968.99,1681.1 2069.38,1781.5 2135.83,1781.5 2140.75,1786.42 U1.105@2140.75,1850.39
  Bottom w3.94: v1(1511.81,1448.82) 1517.72,1454.72 1517.72,1494.77 1568.22,1545.28 1660.74,1545.28 1688.98,1573.51 1688.98,1610.91 1745.39,1667.32 1750,1667.32 v1(1765.75,1683.07)
I2S0-DIN: CON1.38 U7.C1 | length 130
  Top w3.94: CON1.38@240.94,340.94 309.45,409.45 U7.C1@342.52,409.45
I2S0-DOUT: CON1.40 U7.B1 | length 327.2
  Top w3.94: CON1.40@240.94,240.94 194.88,287.01 194.88,381.89 204.72,391.73 267.72,391.73 305.12,429.13 U7.B1@342.52,429.13
I2S0-LRCK: CON1.35 U7.D1 | length 561.3
  Top w3.94: CON1.35@140.94,440.94 187.01,394.88 187.01,226.38 208.66,204.72 271.65,204.72 283.46,216.54 283.46,364.17 309.06,389.76 U7.D1@342.52,389.76
I2S0-SCLK/: CON1.12 U7.A1 | length 1354
  Top w3.94: v1(192.91,480.32) 289.37,480.32 320.87,448.82 U7.A1@342.52,448.82
  Bottom w3.94: v1(192.91,480.32) 189.96,477.36 187.01,480.32 187.01,1587.01 CON1.12@240.94,1640.94
I2S0_LRCK_TX: U1.197 U7.D3 | length 2071.7
  Top w3.94: U7.D3@381.89,389.76 411.42,389.76 507.87,486.22 507.87,1166.64 627.95,1286.72 627.95,1364.17 616.14,1375.98 v1(614.17,1375.98) ; v1(706.69,1659.45) 706.69,1657.48 720.47,1671.26 720.47,1693.53 737.57,1710.63 986.72,1710.63 1043.81,1767.72 1153.14,1767.72 1156.5,1771.08 U1.197@1156.5,1850.39
  Bottom w3.94: v1(614.17,1375.98) 662.83,1375.98 728.35,1441.5 728.35,1633.86 706.69,1655.51 v1(706.69,1659.45)
I2S0_MCLK: R61.1 U1.212 U13.62 | length 779.2
  Top w3.94: U1.212@1008.86,1527.56 1008.86,1491.14 915.35,1397.64 915.35,1375.98 891.73,1352.36 891.73,1293.31 891.73,1173.23 964.57,1100.39 U13.62@1026.58,1100.4 1088.58,1100.39 1137.8,1149.61 1152.87,1149.61 1173.23,1169.97 1173.9,1169.29 1183.07,1169.29 1192.91,1179.13 R61.1@1204.72,1179.13
I2S0_SCLK_TX: U1.199 U7.A3 | length 2006.8
  Top w3.94: U7.A3@381.89,448.82 437.07,448.82 484.25,496.01 484.25,1176.42 572.83,1265 572.83,1362.2 v1(586.61,1375.98) ; v1(706.69,1679.13) 706.69,1690.89 734.31,1718.5 983.46,1718.5 1040.55,1775.59 1131.48,1775.59 1136.81,1780.92 U1.199@1136.81,1850.39
  Bottom w3.94: v1(586.61,1375.98) 600.39,1389.76 665.47,1389.76 720.47,1444.77 720.47,1624.21 692.91,1651.77 692.91,1665.35 v1(706.69,1679.13)
I2S0_SDI0: U1.195 U7.C3 | length 2040.3
  Top w3.94: U7.C3@381.89,409.45 419.97,409.45 500,489.48 500,1169.9 614.17,1284.07 v1(614.17,1356.3) ; v1(734.25,1679.13) 734.25,1696.17 740.83,1702.76 989.98,1702.76 1047.07,1759.84 1159.04,1759.84 1176.18,1776.98 U1.195@1176.18,1850.39
  Bottom w3.94: v1(614.17,1356.3) 654.28,1356.3 736.22,1438.24 736.22,1637.12 720.47,1652.87 720.47,1665.35 v1(734.25,1679.13)
I2S0_SDO0: U1.193 U7.B3 | length 2061.1
  Top w3.94: U7.B3@381.89,429.13 428.52,429.13 492.13,492.74 492.13,1173.16 586.61,1267.65 v1(586.61,1356.3) ; v1(734.25,1659.45) 748.03,1673.23 748.03,1688.98 753.94,1694.88 993.25,1694.88 1050.33,1751.97 1163.39,1751.97 1195.87,1784.45 U1.193@1195.87,1850.39
  Bottom w3.94: v1(586.61,1356.3) 602.36,1340.55 649.66,1340.55 746.06,1436.95 746.06,1647.64 v1(734.25,1659.45)
I2S1DIN: U1.222 U13.14 | length 1741.7
  Top w3.94: v1(545.28,582.68) 539.37,588.58 539.37,1153.59 669.29,1283.51 669.29,1314.4 717.1,1362.2 817.35,1362.2 910.43,1455.28 U1.222@910.43,1527.56 ; v1(984.25,627.95) U13.14@1026.58,627.95
  Bottom w3.94: v1(545.28,582.68) 584.65,622.05 584.65,669.97 607.59,692.91 893.64,692.91 944.82,641.73 970.47,641.73 v1(984.25,627.95)
I2S1DOUT: U1.220 U13.12 | length 1738.4
  Top w3.94: v1(564.96,582.68) 547.24,600.39 547.24,1150.33 677.17,1280.25 677.17,1311.14 720.36,1354.33 820.62,1354.33 930.12,1463.83 U1.220@930.12,1527.56 ; v1(964.57,627.95) 984.25,608.27 U13.12@1026.58,608.27
  Bottom w3.94: v1(564.96,582.68) 592.52,610.24 592.52,666.71 610.85,685.04 890.38,685.04 947.47,627.95 v1(964.57,627.95)
LCD_RESET_L: Q18.1 U1.126 | length 1056
  Top w3.94: Q18.1@1206.69,1013.78 1206.69,1011.81 v1(1261.81,1011.81) ; v1(1537.4,1005.91) 1551.18,1019.69 1551.18,1163.33 1791.4,1403.54 1851.01,1403.54 1934.06,1486.59 U1.126@1934.06,1527.56
  Bottom w3.94: v1(1261.81,1011.81) 1531.5,1011.81 v1(1537.4,1005.91)
LEFT-LINK: R76.1 U1.188 | length 1868.8
  Top w3.94: R76.1@330.71,2681.1 330.71,2475.17 438.98,2366.9 438.98,2139.76 v1(606.3,1972.44) ; v1(1206.69,1480.32) 1226.86,1480.32 1237.78,1491.24 1237.78,1491.72 1245.08,1499.02 U1.188@1245.08,1527.56
  Bottom w3.94: v1(606.3,1972.44) 633.86,1944.88 685.66,1944.88 770.3,1860.24 995.39,1860.24 1019.69,1835.94 1019.69,1551.18 1057.09,1513.78 1173.23,1513.78 v1(1206.69,1480.32)
MIPI_CAM1_PDN_L: J9809.5 U1.114 | length 3967.7
  Top w3.94: v1(1580.71,1027.56) 1580.71,1159.45 1801.18,1379.92 1860.8,1379.92 1947.41,1466.54 2020.16,1466.54 2044.87,1491.24 2044.87,1491.72 2052.17,1499.02 U1.114@2052.17,1527.56 ; v1(3454.72,561.02) J9809.5@3500,561.02
  内层3 w3.94: v1(1580.71,1027.56) 1568.9,1039.37 1466.54,1039.37 1456.69,1029.53 1456.69,722.64 1604.53,574.8 1927.17,574.8 1933.07,580.71 1974.41,580.71 1996.06,559.06 1996.06,346.46 2019.69,322.83 2694.88,322.83 2746.06,271.65 2978.35,271.65 3374.02,271.65 3401.57,299.21 3401.57,507.87 v1(3454.72,561.02)
  Bottom w3.94: v1(1580.71,1027.56) 1633.86,1027.56 v1(1704.72,956.69)
MIPI_CAM1_PWREN_H: R57.1 U1.124 U13.20 | length 1441.8
  Top w3.94: U13.20@1026.58,687.01 1092.52,687.01 R57.1@1106.3,673.23 1124.02,690.94 1322.16,690.94 1531.5,900.28 1531.5,980.32 1559.06,1007.87 1559.06,1160.07 1794.66,1395.67 1854.27,1395.67 1946.85,1488.25 1946.85,1492.13 1953.74,1499.02 U1.124@1953.74,1527.56
MIPI_CAM1_RST_L: U1.89 U3.C3 | length 2705.3
  Top w3.94: U3.C3@381.89,763.78 421.26,763.78 429.13,771.65 429.13,1011.81 v1(407.48,1033.46) ; v1(1763.78,1582.68) 1781.5,1600.39 1978.19,1600.39 2096.3,1718.5 2196.11,1718.5 2290.93,1813.33 2290.93,1814.55 2298.23,1821.85 U1.89@2298.23,1850.39
  Bottom w3.94: v1(407.48,1033.46) 393.7,1019.69 393.7,980.51 401.77,972.44 502.64,972.44 543.98,1013.78 829.76,1013.78 1176.21,1360.24 1511.75,1360.24 1584.65,1433.13 1584.65,1489.96 1592.72,1498.03 1684.36,1498.03 1754.39,1568.06 1754.39,1573.29 v1(1763.78,1582.68)
MIPI_CAM2_PDN_L: J9810.5 U1.120 | length 1770.7
  Top w3.94: U1.120@1993.11,1527.56 1993.11,1580.71 2056.1,1643.7 2594.49,1643.7 2610.24,1659.45 2661.42,1659.45 2688.98,1687.01 2714.57,1687.01 v1(2720.47,1681.1) ; v1(3120.08,1604.33) 3124.02,1608.27 3301.18,1608.27 3403.54,1505.91 J9810.5@3501.97,1505.91
  Bottom w3.94: v1(2720.47,1681.1) 2783.46,1618.11 2783.46,1554.16 2792.35,1545.28 3061.02,1545.28 v1(3120.08,1604.33)
MIPI_CAM2_PWREN_H: U1.93 U3.B3 | length 2548.2
  Top w3.94: U3.B3@381.89,783.46 407.48,783.46 421.26,797.24 421.26,992.13 v1(407.48,1005.91) ; v1(1744.09,1602.36) 1757.87,1616.14 1970.84,1616.14 2088.95,1734.25 2187.99,1734.25 2258.86,1805.12 U1.93@2258.86,1850.39
  Bottom w3.94: v1(407.48,1005.91) 425.2,988.19 496.12,988.19 537.46,1029.53 823.23,1029.53 1169.69,1375.98 1505.23,1375.98 1568.9,1439.65 1568.9,1496.48 1586.19,1513.78 1677.84,1513.78 1726.38,1562.32 1726.38,1584.65 v1(1744.09,1602.36)
MIPI_CAM2_RST_L: U1.91 U3.A3 | length 2510.7
  Top w3.94: U3.A3@381.89,803.15 407.48,803.15 413.39,809.06 413.39,980.32 v1(407.48,986.22) ; v1(1744.09,1582.68) 1769.69,1608.27 1974.1,1608.27 2092.21,1726.38 2191.93,1726.38 2278.54,1812.99 U1.91@2278.54,1850.39
  Bottom w3.94: v1(407.48,986.22) 413.39,980.32 499.38,980.32 540.72,1021.65 826.49,1021.65 1172.95,1368.11 1508.49,1368.11 1576.77,1436.39 1576.77,1493.22 1589.46,1505.91 1681.1,1505.91 1744.09,1568.9 v1(1744.09,1582.68)
MIPI_CAM3_PDN_L: R95204.1 U1.183 | length 3416.2
  Top w3.94: v1(370.08,190.94) 370.08,226.38 377.95,234.25 R95204.1@397.64,234.25 ; U1.183@1294.29,1850.39 1294.29,1800.2 v1(1295.28,1799.21)
  内层3 w3.94: v1(370.08,190.94) 69.1,190.94 -19.68,279.73 -19.68,1746.06 116.14,1881.89 576.77,1881.89 624.02,1834.65 1259.84,1834.65 v1(1295.28,1799.21)
MIPI_CSI0_RX_CLK1N: J9809.8 U1.10 | length 1165.1
  Top w3.94: U1.10@3075.79,1527.56 3075.79,1497.05 3070.87,1492.13 3070.87,1477.36 3107.28,1440.94 3234.25,1440.94 3261.81,1413.39 3261.81,1046.26 3432.09,875.98 3432.09,808.07 v1(3437.01,803.15) ; v1(3437.01,753.94) 3432.09,749.02 3432.09,675.2 3442.91,664.37 3462.6,664.37 3477.36,679.13 J9809.8@3500,679.13
  Bottom w3.94: v1(3437.01,753.94) 3432.09,758.86 3432.09,798.23 v1(3437.01,803.15)
MIPI_CSI0_RX_CLK1P: J9809.7 U1.12 | length 1181.4
  Top w3.94: U1.12@3056.1,1527.56 3056.1,1497.05 3061.02,1492.13 3061.02,1473.29 3103.21,1431.1 3230.18,1431.1 3251.97,1409.31 3251.97,1042.18 3422.24,871.91 3422.24,808.07 v1(3417.32,803.15) ; v1(3417.32,753.94) 3422.24,749.02 3422.24,671.12 3438.84,654.53 3460.63,654.53 3475.39,639.76 J9809.7@3500,639.76
  Bottom w3.94: v1(3417.32,753.94) 3422.24,758.86 3422.24,798.23 v1(3417.32,803.15)
MIPI_CSI0_RX_D2N: J9809.14 U1.4 | length 878.9
  Top w3.94: U1.4@3134.84,1527.56 3134.84,1499.02 3129.92,1494.09 3129.92,1481.44 3144.82,1466.54 3246.06,1466.54 3287.4,1425.2 3287.4,1060.04 3446.85,900.59 3462.11,900.59 3476.87,915.35 J9809.14@3500,915.35
MIPI_CSI0_RX_D2P: J9809.13 U1.6 | length 895.2
  Top w3.94: U1.6@3115.16,1527.56 3115.16,1499.02 3120.08,1494.09 3120.08,1477.36 3140.75,1456.69 3241.99,1456.69 3277.56,1421.12 3277.56,1055.96 3442.77,890.75 3462.11,890.75 3476.87,875.98 J9809.13@3500,875.98
MIPI_CSI0_RX_D3N: J9809.11 U1.16 | length 1116.2
  Top w3.94: U1.16@3016.73,1527.56 3016.73,1499.02 3011.81,1494.09 3011.81,1467.52 3063.98,1415.35 3222.44,1415.35 3236.22,1401.57 3236.22,930.26 3384,782.48 3460.63,782.48 3475.39,797.24 J9809.11@3500,797.24
MIPI_CSI0_RX_D3P: J9809.10 U1.18 | length 1132.5
  Top w3.94: U1.18@2997.05,1527.56 2997.05,1499.02 3001.97,1494.09 3001.97,1463.44 3059.9,1405.51 3218.36,1405.51 3226.38,1397.5 3226.38,926.18 3379.92,772.64 3460.63,772.64 3475.39,757.87 J9809.10@3500,757.87
MIPI_DPHY0_RX_CLKN: J9810.8 U1.28 | length 759.8
  Top w3.94: v1(2897.64,1570.87) 2897.64,1527.56 U1.28@2898.62,1527.56 ; v1(2897.64,1616.14) 2897.44,1616.14 2892.72,1611.42 2892.72,1603.49 2897.78,1598.43 2927.03,1598.43 2946.71,1618.11 3072.69,1618.11 3098.29,1643.7 3391.87,1643.7 3427.31,1608.27 3463.58,1608.27 3479.33,1624.02 J9810.8@3501.97,1624.02
  Bottom w3.94: v1(2897.64,1570.87) 2892.72,1575.79 2892.72,1611.22 v1(2897.64,1616.14)
MIPI_DPHY0_RX_CLKP: J9810.7 U1.30 | length 775.1
  Top w3.94: v1(2877.95,1570.87) 2877.95,1527.56 U1.30@2878.94,1527.56 ; v1(2877.95,1616.14) 2882.87,1611.22 2882.87,1599.41 2893.7,1588.58 2931.1,1588.58 2950.79,1608.27 3076.77,1608.27 3102.36,1633.86 3387.8,1633.86 3423.23,1598.43 3463.58,1598.43 3477.36,1584.65 J9810.7@3501.97,1584.65
  Bottom w3.94: v1(2877.95,1570.87) 2882.87,1575.79 2882.87,1611.22 v1(2877.95,1616.14)
MIPI_DPHY0_RX_D0N: J9810.14 U1.22 | length 811.2
  Top w3.94: v1(2956.69,1570.87) 2956.69,1527.56 U1.22@2957.68,1527.56 ; v1(2956.69,1687.01) 2951.77,1682.09 2951.77,1673.37 2955.85,1669.29 3041.2,1669.29 3171.12,1799.21 3403.54,1799.21 3450.79,1846.46 3463.58,1846.46 3477.36,1860.24 J9810.14@3501.97,1860.24
  Bottom w3.94: v1(2956.69,1570.87) 2951.77,1575.79 2951.77,1682.09 v1(2956.69,1687.01)
MIPI_DPHY0_RX_D0P: J9810.13 U1.24 | length 827.5
  Top w3.94: v1(2937.01,1570.87) 2937.01,1527.56 U1.24@2937.99,1527.56 ; v1(2937.01,1687.01) 2941.93,1682.09 2941.93,1669.29 2951.77,1659.45 3045.28,1659.45 3175.2,1789.37 3408.46,1789.37 3454.72,1835.63 3463.58,1835.63 3478.35,1820.87 J9810.13@3501.97,1820.87
  Bottom w3.94: v1(2937.01,1570.87) 2941.93,1575.79 2941.93,1682.09 v1(2937.01,1687.01)
MIPI_DPHY0_RX_D1N: J9810.11 U1.34 | length 895.8
  Top w3.94: v1(2838.58,1570.87) 2838.58,1527.56 U1.34@2839.57,1527.56 ; v1(2838.58,1661.42) 2833.66,1656.5 2833.66,1648.76 2838.72,1643.7 3053.01,1643.7 3155.37,1746.06 3273.62,1746.06 3311.02,1708.66 3422.24,1708.66 3440.94,1727.36 3461.61,1727.36 3476.38,1742.13 J9810.11@3501.97,1742.13
  Bottom w3.94: v1(2838.58,1570.87) 2833.66,1575.79 2833.66,1656.5 v1(2838.58,1661.42)